# EAGLE board touch_pot_panel_v13 (EAGLE 7.3.0), part 1 of 4
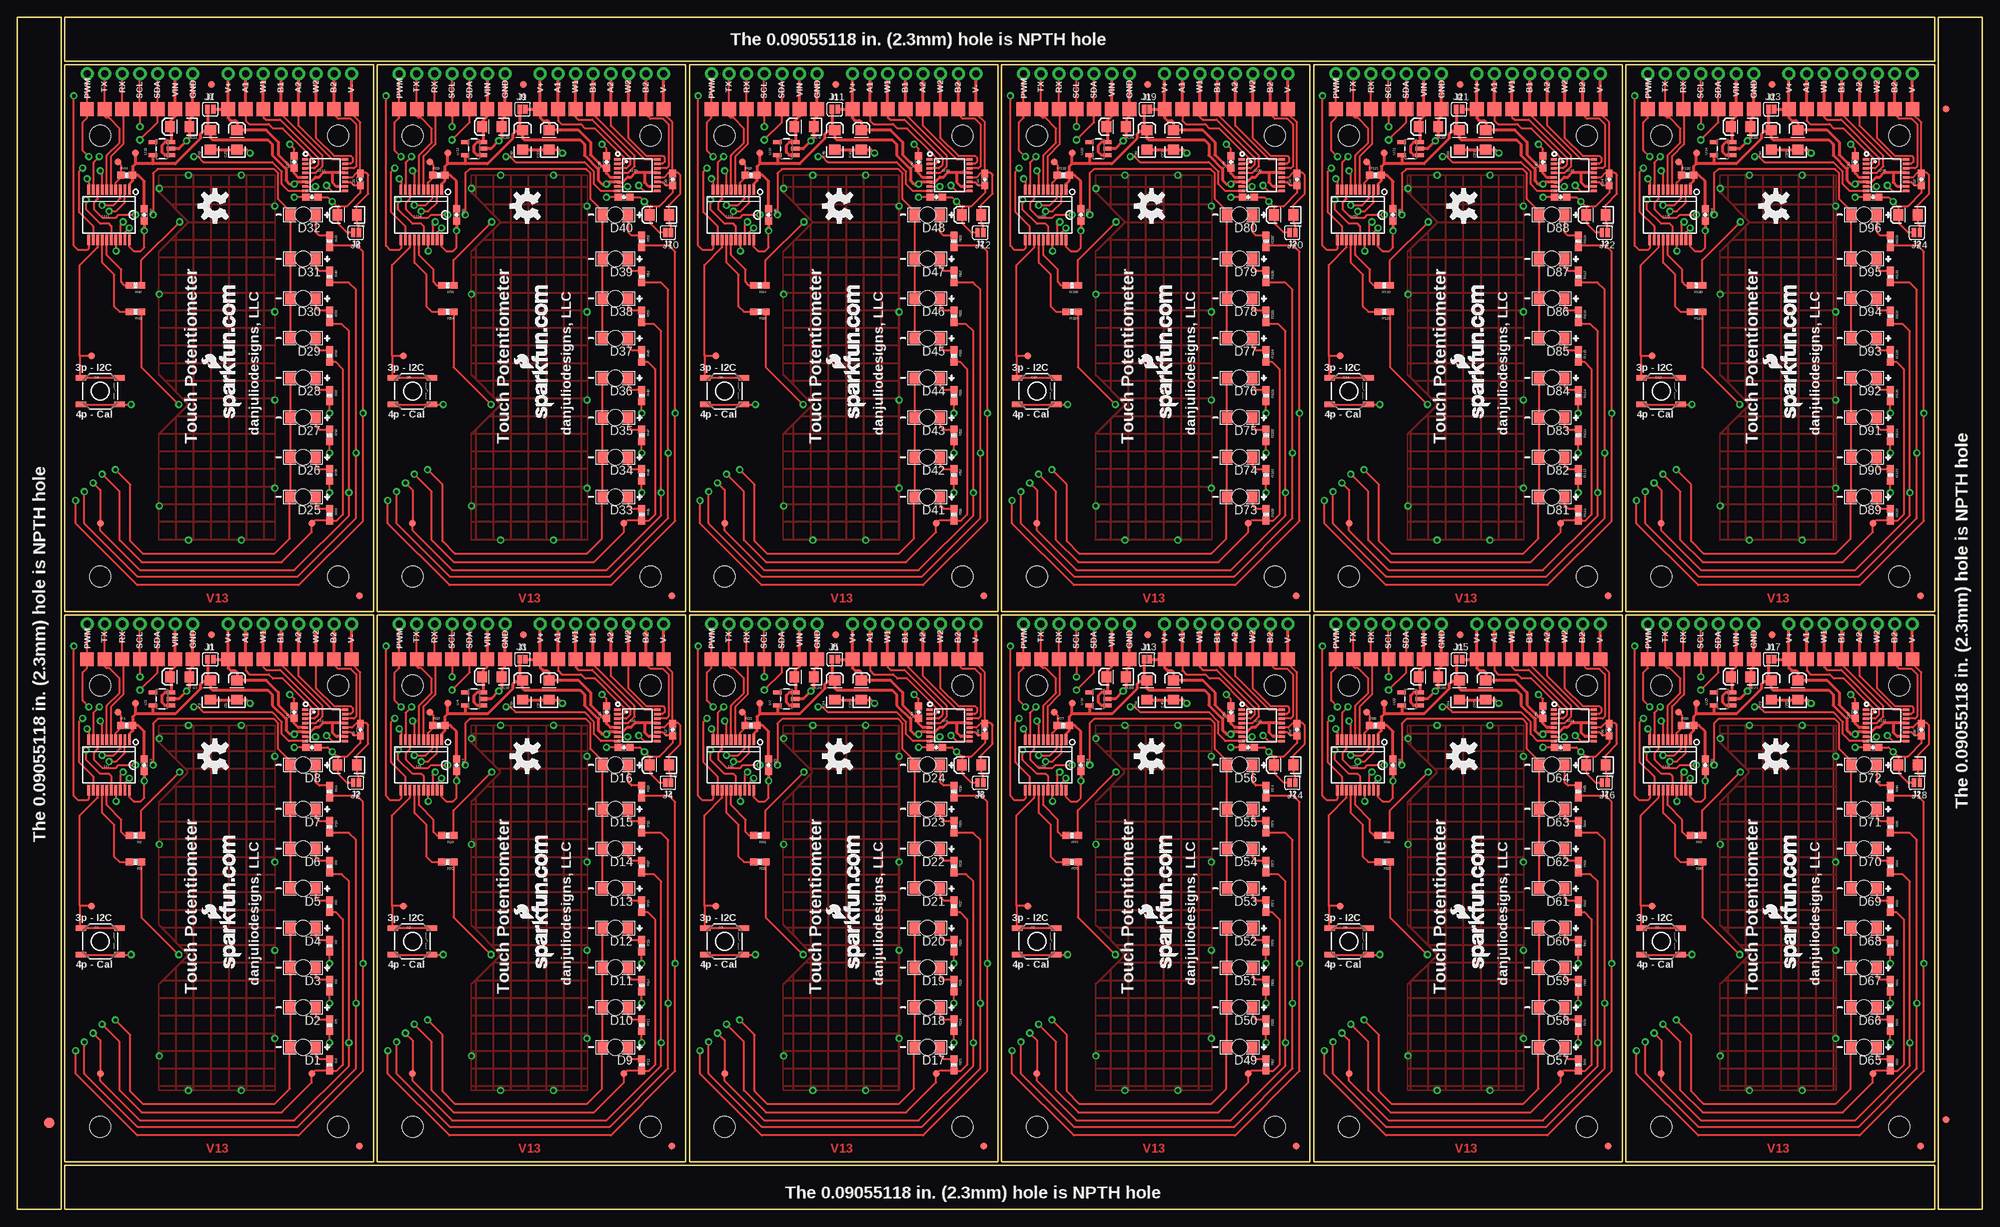
[diagram p0: board, top side]
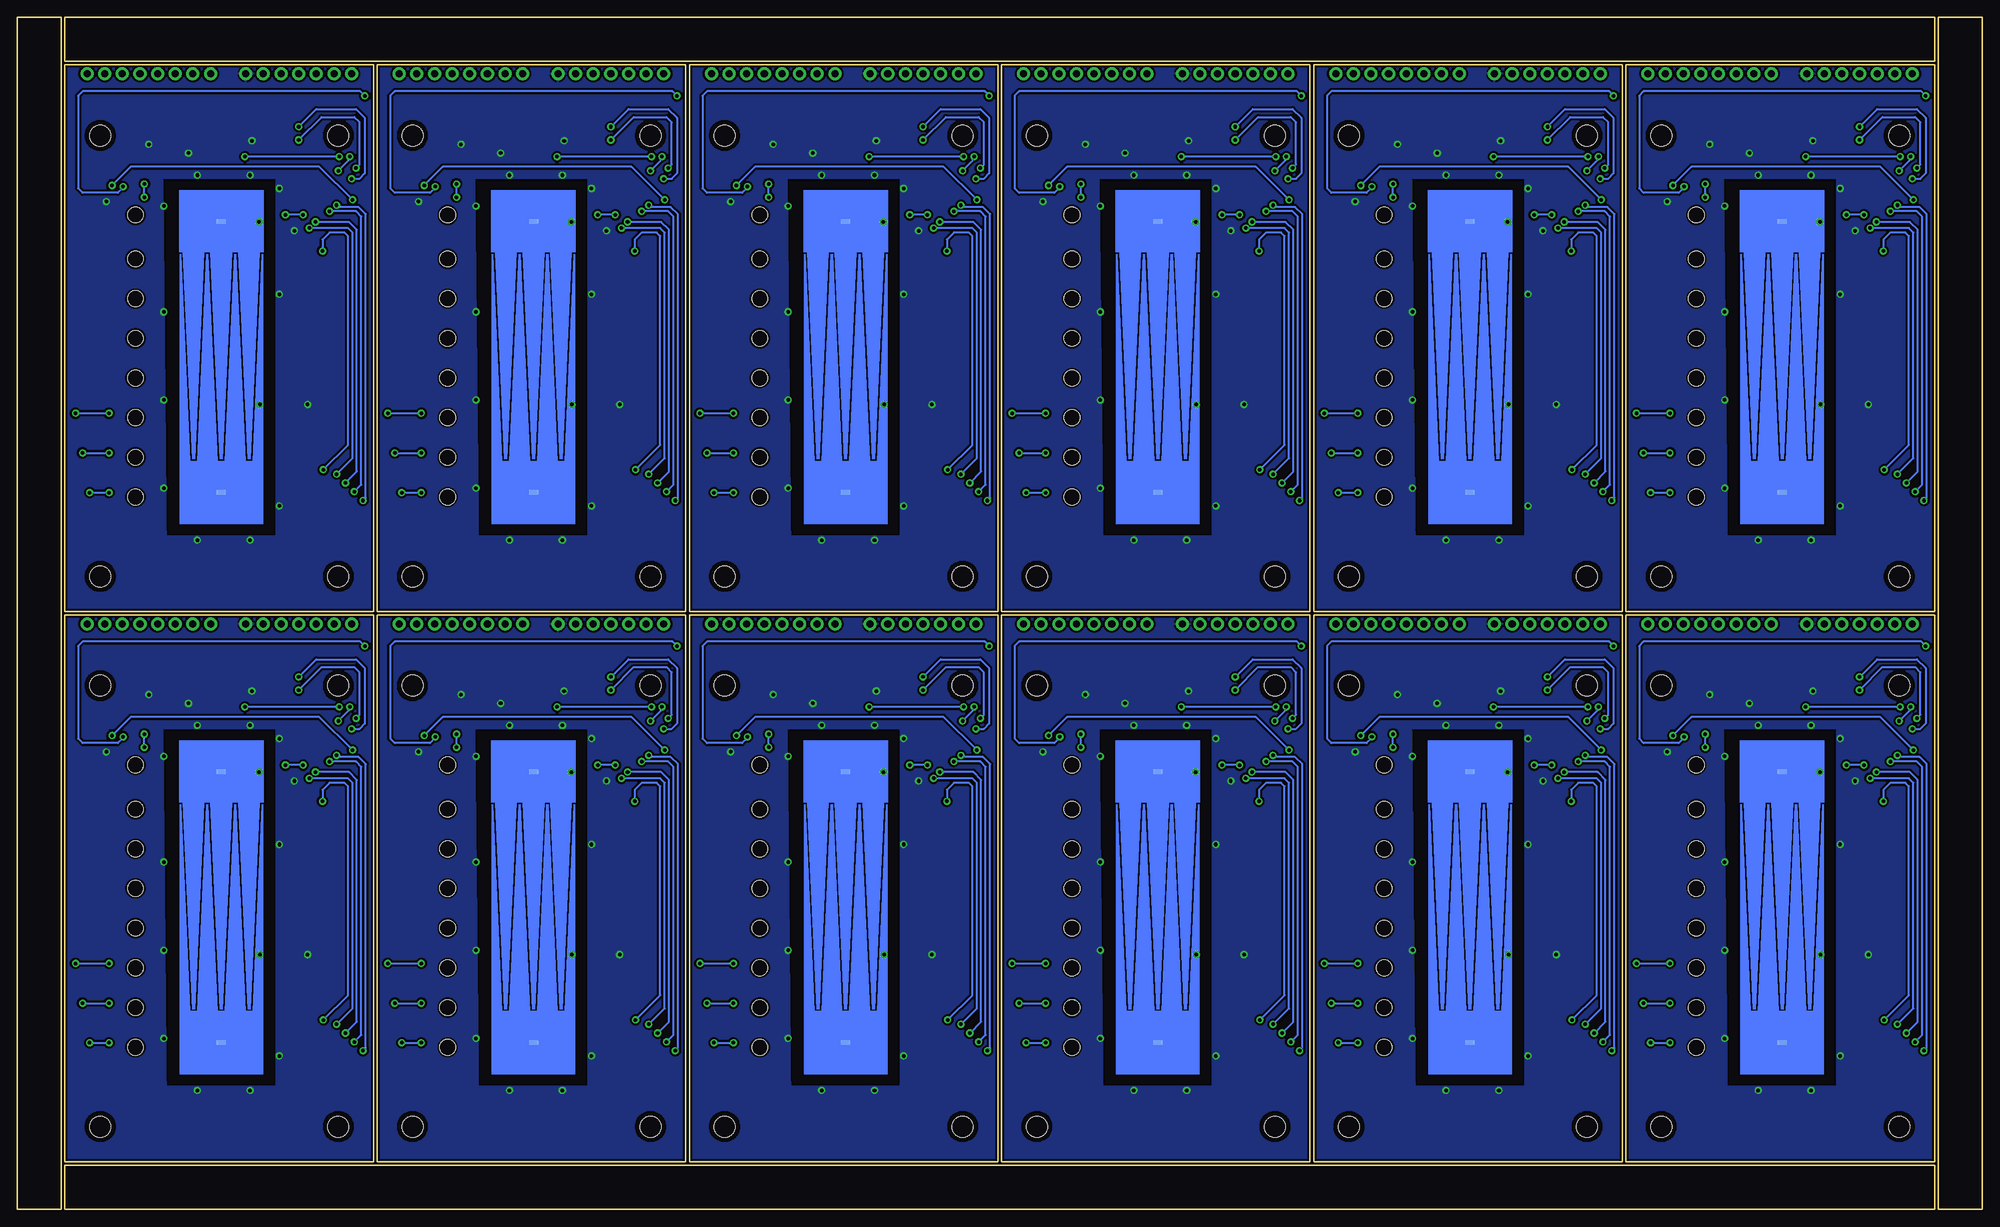
[diagram p1: board, bottom side, seen from below]

Size 282.96 x 171.7 mm. Coordinates in mm from the lower left corner, seen from the top.
Outline: 6.35,79.25 6.35,0 0,0 0,29.72
Outline: 0,27.18 0,171.7 6.35,171.7 6.35,76.71
Outline: 79.25,0 6.86,0 6.86,6.35 29.72,6.35
Outline: 27.18,6.35 276.1,6.35 276.1,0 76.71,0
Outline: 203.71,171.7 276.1,171.7 276.1,165.35 253.24,165.35
Outline: 255.78,165.35 6.86,165.35 6.86,171.7 206.25,171.7
Outline: 276.61,92.46 276.61,171.7 282.96,171.7 282.96,141.99
Outline: 282.96,144.53 282.96,0 276.61,0 276.61,95
Outline: 6.86,6.86 51.31,6.86 51.31,85.6 6.86,85.6 6.86,6.86
Outline: 51.82,6.86 96.27,6.86 96.27,85.6 51.82,85.6 51.82,6.86
Outline: 96.77,6.86 141.22,6.86 141.22,85.6 96.77,85.6 96.77,6.86
Outline: 6.86,86.11 51.31,86.11 51.31,164.85 6.86,164.85 6.86,86.11
Outline: 51.82,86.11 96.27,86.11 96.27,164.85 51.82,164.85 51.82,86.11
Outline: 96.77,86.11 141.22,86.11 141.22,164.85 96.77,164.85 96.77,86.11
Outline: 141.73,6.86 186.18,6.86 186.18,85.6 141.73,85.6 141.73,6.86
Outline: 186.69,6.86 231.14,6.86 231.14,85.6 186.69,85.6 186.69,6.86
Outline: 231.65,6.86 276.1,6.86 276.1,85.6 231.65,85.6 231.65,6.86
Outline: 141.73,86.11 186.18,86.11 186.18,164.85 141.73,164.85 141.73,86.11
Outline: 186.69,86.11 231.14,86.11 231.14,164.85 186.69,164.85 186.69,86.11
Outline: 231.65,86.11 276.1,86.11 276.1,164.85 231.65,164.85 231.65,86.11
Copper layers (1*16): Top 0.035mm / dielectric 1.5mm / Bottom 0.035mm
Design rules "SparkFun-2-layer": minimum track width 7mil, minimum drill 15mil, track to track 8mil, track to pad 8mil, pad to pad 8mil, via to via 8mil, smd to smd 8mil, copper to edge 8mil, drill to drill 8mil, minimum pad ring 12mil, minimum via ring 10mil, stop-mask expansion 4mil, vias tented up to drill 20mil, thermal gap 10mil

## Footprints (pad centres in the part's own frame; a part is rotated, then mirrored left to right if it is on the bottom)
EIA3216 = smd 1.4 x 1.6: A 1.4,0; C -1.4,0
0603-CAP = smd 1.1 x 1: 1 -0.85,0; 2 0.85,0
LED-1206-BOTTOM = smd 1.5 x 1.6: A -1.8,0; C 1.8,0 | hole 2.3: 0,0
FIDUCIAL-1.5X3 = smd 1.5 x 1.5: 1 0,0
FIDUCIAL-1X2 = smd 1 x 1: 1 0,0
SJ_2S = smd 0.635 x 1.27: 1 -0.412,0; 2 0.412,0
1X01NS = drill 1.016 pad 1.88: 1 0,0
0603-RES = smd 1.1 x 1: 1 -0.85,0; 2 0.85,0
TACTILE-SWITCH-SMD = smd 1.524 x 0.762: 1 -2.794,1.905; 2 2.794,1.905; 3 -2.794,-1.905; 4 2.794,-1.905
STAND-OFF-TIGHT = hole 3.048: 0,0
PAD.03X.04 = smd 1.016 x 1.016: P$1 0,0
2MM_SMD_PAD = smd 2 x 2: P$1 0,0
2CH_48MM_LINEAR_TOUCH = smd 1.27 x 0.635: P$1 6,4.5; P$2 6,43.5
SSOP20 = smd 0.4 x 1.5: 1 -2.925,-3.625; 2 -2.275,-3.625; 3 -1.625,-3.625; 4 -0.975,-3.625; 5 -0.325,-3.625; 6 0.325,-3.625; 7 0.975,-3.625; 8 1.625,-3.625; 9 2.275,-3.625; 10 2.925,-3.625; 11 2.925,3.625; 12 2.275,3.625; 13 1.625,3.625; 14 0.975,3.625; 15 0.325,3.625; 16 -0.325,3.625; 17 -0.975,3.625; 18 -1.625,3.625; 19 -2.275,3.625; 20 -2.925,3.625
SSOP16 = smd 0.9 x 0.35: 1 -2.875,2.275; 2 -2.875,1.625; 3 -2.875,0.975; 4 -2.875,0.325; 5 -2.875,-0.325; 6 -2.875,-0.975; 7 -2.875,-1.625; 8 -2.875,-2.275; 9 2.875,-2.275; 10 2.875,-1.625; 11 2.875,-0.975; 12 2.875,-0.325; 13 2.875,0.325; 14 2.875,0.975; 15 2.875,1.625; 16 2.875,2.275
SOT23-5 = smd 0.55 x 1.2: 1 -0.95,-1.3; 2 0,-1.3; 3 0.95,-1.3; 4 0.95,1.3; 5 -0.95,1.3

## Placement (x,y rotation side)
C1  10uF  [EIA3216]  23.37,76.71 180 top
C2  10uF  [EIA3216]  27.81,74.8 90 top
C3  0.1uF  [0603-CAP]  18.29,64.01 270 top
C4  0.1uF  [0603-CAP]  42.42,66.55 0 top
C5  10uF  [EIA3216]  31.62,74.8 90 top
C6  0.1uF  [0603-CAP]  39.88,71.63 90 top
C7  10uF  [EIA3216]  47.5,64.01 180 top
C8  0.1uF  [0603-CAP]  49.4,69.09 90 top
C9  10uF  [EIA3216]  76.58,74.8 90 top
C10  10uF  [EIA3216]  92.46,64.01 180 top
C11  0.1uF  [0603-CAP]  84.84,71.63 90 top
C12  0.1uF  [0603-CAP]  94.36,69.09 90 top
C13  0.1uF  [0603-CAP]  87.38,66.55 0 top
C14  0.1uF  [0603-CAP]  63.25,64.01 270 top
C15  10uF  [EIA3216]  68.33,76.71 180 top
C16  10uF  [EIA3216]  72.77,74.8 90 top
C17  10uF  [EIA3216]  121.54,74.8 90 top
C18  10uF  [EIA3216]  137.41,64.01 180 top
C19  0.1uF  [0603-CAP]  129.79,71.63 90 top
C20  0.1uF  [0603-CAP]  139.32,69.09 90 top
C21  0.1uF  [0603-CAP]  132.33,66.55 0 top
C22  0.1uF  [0603-CAP]  108.2,64.01 270 top
C23  10uF  [EIA3216]  113.28,76.71 180 top
C24  10uF  [EIA3216]  117.73,74.8 90 top
C25  10uF  [EIA3216]  31.62,154.05 90 top
C26  10uF  [EIA3216]  47.5,143.26 180 top
C27  0.1uF  [0603-CAP]  39.88,150.88 90 top
C28  0.1uF  [0603-CAP]  49.4,148.34 90 top
C29  0.1uF  [0603-CAP]  42.42,145.8 0 top
C30  0.1uF  [0603-CAP]  18.29,143.26 270 top
C31  10uF  [EIA3216]  23.37,155.96 180 top
C32  10uF  [EIA3216]  27.81,154.05 90 top
C33  10uF  [EIA3216]  76.58,154.05 90 top
C34  10uF  [EIA3216]  92.46,143.26 180 top
C35  0.1uF  [0603-CAP]  84.84,150.88 90 top
C36  0.1uF  [0603-CAP]  94.36,148.34 90 top
C37  0.1uF  [0603-CAP]  87.38,145.8 0 top
C38  0.1uF  [0603-CAP]  63.25,143.26 270 top
C39  10uF  [EIA3216]  68.33,155.96 180 top
C40  10uF  [EIA3216]  72.77,154.05 90 top
C41  10uF  [EIA3216]  121.54,154.05 90 top
C42  10uF  [EIA3216]  137.41,143.26 180 top
C43  0.1uF  [0603-CAP]  129.79,150.88 90 top
C44  0.1uF  [0603-CAP]  139.32,148.34 90 top
C45  0.1uF  [0603-CAP]  132.33,145.8 0 top
C46  0.1uF  [0603-CAP]  108.2,143.26 270 top
C47  10uF  [EIA3216]  113.28,155.96 180 top
C48  10uF  [EIA3216]  117.73,154.05 90 top
C49  10uF  [EIA3216]  166.5,74.8 90 top
C50  10uF  [EIA3216]  182.37,64.01 180 top
C51  0.1uF  [0603-CAP]  174.75,71.63 90 top
C52  0.1uF  [0603-CAP]  184.28,69.09 90 top
C53  0.1uF  [0603-CAP]  177.29,66.55 0 top
C54  0.1uF  [0603-CAP]  153.16,64.01 270 top
C55  10uF  [EIA3216]  158.24,76.71 180 top
C56  10uF  [EIA3216]  162.69,74.8 90 top
C57  10uF  [EIA3216]  211.46,74.8 90 top
C58  10uF  [EIA3216]  227.33,64.01 180 top
C59  0.1uF  [0603-CAP]  219.71,71.63 90 top
C60  0.1uF  [0603-CAP]  229.24,69.09 90 top
C61  0.1uF  [0603-CAP]  222.25,66.55 0 top
C62  0.1uF  [0603-CAP]  198.12,64.01 270 top
C63  10uF  [EIA3216]  203.2,76.71 180 top
C64  10uF  [EIA3216]  207.65,74.8 90 top
C65  10uF  [EIA3216]  256.41,74.8 90 top
C66  10uF  [EIA3216]  272.29,64.01 180 top
C67  0.1uF  [0603-CAP]  264.67,71.63 90 top
C68  0.1uF  [0603-CAP]  274.19,69.09 90 top
C69  0.1uF  [0603-CAP]  267.21,66.55 0 top
C70  0.1uF  [0603-CAP]  243.08,64.01 270 top
C71  10uF  [EIA3216]  248.16,76.71 180 top
C72  10uF  [EIA3216]  252.6,74.8 90 top
C73  10uF  [EIA3216]  166.5,154.05 90 top
C74  10uF  [EIA3216]  182.37,143.26 180 top
C75  0.1uF  [0603-CAP]  174.75,150.88 90 top
C76  0.1uF  [0603-CAP]  184.28,148.34 90 top
C77  0.1uF  [0603-CAP]  177.29,145.8 0 top
C78  0.1uF  [0603-CAP]  153.16,143.26 270 top
C79  10uF  [EIA3216]  158.24,155.96 180 top
C80  10uF  [EIA3216]  162.69,154.05 90 top
C81  10uF  [EIA3216]  211.46,154.05 90 top
C82  10uF  [EIA3216]  227.33,143.26 180 top
C83  0.1uF  [0603-CAP]  219.71,150.88 90 top
C84  0.1uF  [0603-CAP]  229.24,148.34 90 top
C85  0.1uF  [0603-CAP]  222.25,145.8 0 top
C86  0.1uF  [0603-CAP]  198.12,143.26 270 top
C87  10uF  [EIA3216]  203.2,155.96 180 top
C88  10uF  [EIA3216]  207.65,154.05 90 top
C89  10uF  [EIA3216]  256.41,154.05 90 top
C90  10uF  [EIA3216]  272.29,143.26 180 top
C91  0.1uF  [0603-CAP]  264.67,150.88 90 top
C92  0.1uF  [0603-CAP]  274.19,148.34 90 top
C93  0.1uF  [0603-CAP]  267.21,145.8 0 top
C94  0.1uF  [0603-CAP]  243.08,143.26 270 top
C95  10uF  [EIA3216]  248.16,155.96 180 top
C96  10uF  [EIA3216]  252.6,154.05 90 top
D1  Green  [LED-1206-BOTTOM]  41.15,23.37 180 top
D2  Green  [LED-1206-BOTTOM]  41.15,29.08 180 top
D3  Green  [LED-1206-BOTTOM]  41.15,34.8 180 top
D4  Green  [LED-1206-BOTTOM]  41.15,40.51 180 top
D5  Green  [LED-1206-BOTTOM]  41.15,46.23 180 top
D6  Green  [LED-1206-BOTTOM]  41.15,51.94 180 top
D7  Green  [LED-1206-BOTTOM]  41.15,57.66 180 top
D8  Green  [LED-1206-BOTTOM]  41.15,64.01 180 top
D9  Green  [LED-1206-BOTTOM]  86.11,23.37 180 top
D10  Green  [LED-1206-BOTTOM]  86.11,29.08 180 top
D11  Green  [LED-1206-BOTTOM]  86.11,34.8 180 top
D12  Green  [LED-1206-BOTTOM]  86.11,40.51 180 top
D13  Green  [LED-1206-BOTTOM]  86.11,46.23 180 top
D14  Green  [LED-1206-BOTTOM]  86.11,51.94 180 top
D15  Green  [LED-1206-BOTTOM]  86.11,57.66 180 top
D16  Green  [LED-1206-BOTTOM]  86.11,64.01 180 top
D17  Green  [LED-1206-BOTTOM]  131.06,23.37 180 top
D18  Green  [LED-1206-BOTTOM]  131.06,29.08 180 top
D19  Green  [LED-1206-BOTTOM]  131.06,34.8 180 top
D20  Green  [LED-1206-BOTTOM]  131.06,40.51 180 top
D21  Green  [LED-1206-BOTTOM]  131.06,46.23 180 top
D22  Green  [LED-1206-BOTTOM]  131.06,51.94 180 top
D23  Green  [LED-1206-BOTTOM]  131.06,57.66 180 top
D24  Green  [LED-1206-BOTTOM]  131.06,64.01 180 top
D25  Green  [LED-1206-BOTTOM]  41.15,102.62 180 top
D26  Green  [LED-1206-BOTTOM]  41.15,108.33 180 top
D27  Green  [LED-1206-BOTTOM]  41.15,114.05 180 top
D28  Green  [LED-1206-BOTTOM]  41.15,119.76 180 top
D29  Green  [LED-1206-BOTTOM]  41.15,125.48 180 top
D30  Green  [LED-1206-BOTTOM]  41.15,131.19 180 top
D31  Green  [LED-1206-BOTTOM]  41.15,136.91 180 top
D32  Green  [LED-1206-BOTTOM]  41.15,143.26 180 top
D33  Green  [LED-1206-BOTTOM]  86.11,102.62 180 top
D34  Green  [LED-1206-BOTTOM]  86.11,108.33 180 top
D35  Green  [LED-1206-BOTTOM]  86.11,114.05 180 top
D36  Green  [LED-1206-BOTTOM]  86.11,119.76 180 top
D37  Green  [LED-1206-BOTTOM]  86.11,125.48 180 top
D38  Green  [LED-1206-BOTTOM]  86.11,131.19 180 top
D39  Green  [LED-1206-BOTTOM]  86.11,136.91 180 top
D40  Green  [LED-1206-BOTTOM]  86.11,143.26 180 top
D41  Green  [LED-1206-BOTTOM]  131.06,102.62 180 top
D42  Green  [LED-1206-BOTTOM]  131.06,108.33 180 top
D43  Green  [LED-1206-BOTTOM]  131.06,114.05 180 top
D44  Green  [LED-1206-BOTTOM]  131.06,119.76 180 top
D45  Green  [LED-1206-BOTTOM]  131.06,125.48 180 top
D46  Green  [LED-1206-BOTTOM]  131.06,131.19 180 top
D47  Green  [LED-1206-BOTTOM]  131.06,136.91 180 top
D48  Green  [LED-1206-BOTTOM]  131.06,143.26 180 top
D49  Green  [LED-1206-BOTTOM]  176.02,23.37 180 top
D50  Green  [LED-1206-BOTTOM]  176.02,29.08 180 top
D51  Green  [LED-1206-BOTTOM]  176.02,34.8 180 top
D52  Green  [LED-1206-BOTTOM]  176.02,40.51 180 top
D53  Green  [LED-1206-BOTTOM]  176.02,46.23 180 top
D54  Green  [LED-1206-BOTTOM]  176.02,51.94 180 top
D55  Green  [LED-1206-BOTTOM]  176.02,57.66 180 top
D56  Green  [LED-1206-BOTTOM]  176.02,64.01 180 top
D57  Green  [LED-1206-BOTTOM]  220.98,23.37 180 top
D58  Green  [LED-1206-BOTTOM]  220.98,29.08 180 top
D59  Green  [LED-1206-BOTTOM]  220.98,34.8 180 top
D60  Green  [LED-1206-BOTTOM]  220.98,40.51 180 top
D61  Green  [LED-1206-BOTTOM]  220.98,46.23 180 top
D62  Green  [LED-1206-BOTTOM]  220.98,51.94 180 top
D63  Green  [LED-1206-BOTTOM]  220.98,57.66 180 top
D64  Green  [LED-1206-BOTTOM]  220.98,64.01 180 top
D65  Green  [LED-1206-BOTTOM]  265.94,23.37 180 top
D66  Green  [LED-1206-BOTTOM]  265.94,29.08 180 top
D67  Green  [LED-1206-BOTTOM]  265.94,34.8 180 top
D68  Green  [LED-1206-BOTTOM]  265.94,40.51 180 top
D69  Green  [LED-1206-BOTTOM]  265.94,46.23 180 top
D70  Green  [LED-1206-BOTTOM]  265.94,51.94 180 top
D71  Green  [LED-1206-BOTTOM]  265.94,57.66 180 top
D72  Green  [LED-1206-BOTTOM]  265.94,64.01 180 top
D73  Green  [LED-1206-BOTTOM]  176.02,102.62 180 top
D74  Green  [LED-1206-BOTTOM]  176.02,108.33 180 top
D75  Green  [LED-1206-BOTTOM]  176.02,114.05 180 top
D76  Green  [LED-1206-BOTTOM]  176.02,119.76 180 top
D77  Green  [LED-1206-BOTTOM]  176.02,125.48 180 top
D78  Green  [LED-1206-BOTTOM]  176.02,131.19 180 top
D79  Green  [LED-1206-BOTTOM]  176.02,136.91 180 top
D80  Green  [LED-1206-BOTTOM]  176.02,143.26 180 top
D81  Green  [LED-1206-BOTTOM]  220.98,102.62 180 top
D82  Green  [LED-1206-BOTTOM]  220.98,108.33 180 top
D83  Green  [LED-1206-BOTTOM]  220.98,114.05 180 top
D84  Green  [LED-1206-BOTTOM]  220.98,119.76 180 top
D85  Green  [LED-1206-BOTTOM]  220.98,125.48 180 top
D86  Green  [LED-1206-BOTTOM]  220.98,131.19 180 top
D87  Green  [LED-1206-BOTTOM]  220.98,136.91 180 top
D88  Green  [LED-1206-BOTTOM]  220.98,143.26 180 top
D89  Green  [LED-1206-BOTTOM]  265.94,102.62 180 top
D90  Green  [LED-1206-BOTTOM]  265.94,108.33 180 top
D91  Green  [LED-1206-BOTTOM]  265.94,114.05 180 top
D92  Green  [LED-1206-BOTTOM]  265.94,119.76 180 top
D93  Green  [LED-1206-BOTTOM]  265.94,125.48 180 top
D94  Green  [LED-1206-BOTTOM]  265.94,131.19 180 top
D95  Green  [LED-1206-BOTTOM]  265.94,136.91 180 top
D96  Green  [LED-1206-BOTTOM]  265.94,143.26 180 top
E$1  [FIDUCIAL-1.5X3]  4.57,12.45 0 top
E$7  [FIDUCIAL-1X2]  277.75,158.5 180 top
E$8  [FIDUCIAL-1X2]  277.75,12.95 0 top
FID1  FIDUCIAL1X2  [FIDUCIAL-1X2]  27.94,82.8 0 top
FID2  FIDUCIAL1X2  [FIDUCIAL-1X2]  49.28,9.14 0 top
FID3  FIDUCIAL1X2  [FIDUCIAL-1X2]  72.9,82.8 0 top
FID4  FIDUCIAL1X2  [FIDUCIAL-1X2]  94.23,9.14 0 top
FID5  FIDUCIAL1X2  [FIDUCIAL-1X2]  117.86,82.8 0 top
FID6  FIDUCIAL1X2  [FIDUCIAL-1X2]  139.19,9.14 0 top
FID7  FIDUCIAL1X2  [FIDUCIAL-1X2]  27.94,162.05 0 top
FID8  FIDUCIAL1X2  [FIDUCIAL-1X2]  49.28,88.39 0 top
FID9  FIDUCIAL1X2  [FIDUCIAL-1X2]  72.9,162.05 0 top
FID10  FIDUCIAL1X2  [FIDUCIAL-1X2]  94.23,88.39 0 top
FID11  FIDUCIAL1X2  [FIDUCIAL-1X2]  117.86,162.05 0 top
FID12  FIDUCIAL1X2  [FIDUCIAL-1X2]  139.19,88.39 0 top
FID13  FIDUCIAL1X2  [FIDUCIAL-1X2]  162.81,82.8 0 top
FID14  FIDUCIAL1X2  [FIDUCIAL-1X2]  184.15,9.14 0 top
FID15  FIDUCIAL1X2  [FIDUCIAL-1X2]  207.77,82.8 0 top
FID16  FIDUCIAL1X2  [FIDUCIAL-1X2]  229.11,9.14 0 top
FID17  FIDUCIAL1X2  [FIDUCIAL-1X2]  252.73,82.8 0 top
FID18  FIDUCIAL1X2  [FIDUCIAL-1X2]  274.07,9.14 0 top
FID19  FIDUCIAL1X2  [FIDUCIAL-1X2]  162.81,162.05 0 top
FID20  FIDUCIAL1X2  [FIDUCIAL-1X2]  184.15,88.39 0 top
FID21  FIDUCIAL1X2  [FIDUCIAL-1X2]  207.77,162.05 0 top
FID22  FIDUCIAL1X2  [FIDUCIAL-1X2]  229.11,88.39 0 top
FID23  FIDUCIAL1X2  [FIDUCIAL-1X2]  252.73,162.05 0 top
FID24  FIDUCIAL1X2  [FIDUCIAL-1X2]  274.07,88.39 0 top
J1  [SJ_2S]  27.81,79.25 0 top
J2  [SJ_2S]  48.77,61.47 0 top
J3  [SJ_2S]  72.77,79.25 0 top
J4  [SJ_2S]  93.73,61.47 0 top
J5  [SJ_2S]  117.73,79.25 0 top
J6  [SJ_2S]  138.68,61.47 0 top
J7  [SJ_2S]  27.81,158.5 0 top
J8  [SJ_2S]  48.77,140.72 0 top
J9  [SJ_2S]  72.77,158.5 0 top
J10  [SJ_2S]  93.73,140.72 0 top
J11  [SJ_2S]  117.73,158.5 0 top
J12  [SJ_2S]  138.68,140.72 0 top
J13  [SJ_2S]  162.69,79.25 0 top
J14  [SJ_2S]  183.64,61.47 0 top
J15  [SJ_2S]  207.65,79.25 0 top
J16  [SJ_2S]  228.6,61.47 0 top
J17  [SJ_2S]  252.6,79.25 0 top
J18  [SJ_2S]  273.56,61.47 0 top
J19  [SJ_2S]  162.69,158.5 0 top
J20  [SJ_2S]  183.64,140.72 0 top
J21  [SJ_2S]  207.65,158.5 0 top
J22  [SJ_2S]  228.6,140.72 0 top
J23  [SJ_2S]  252.6,158.5 0 top
J24  [SJ_2S]  273.56,140.72 0 top
JP1  [1X01NS]  20.19,84.33 0 top
JP2  [1X01NS]  17.65,84.33 0 top
JP3  [1X01NS]  10.03,84.33 0 top
JP4  [1X01NS]  15.11,84.33 0 top
JP5  [1X01NS]  12.57,84.33 0 top
JP6  [1X01NS]  22.73,84.33 0 top
JP7  [1X01NS]  25.27,84.33 0 top
JP8  [1X01NS]  48.13,84.33 0 top
JP9  [1X01NS]  45.59,84.33 0 top
JP10  [1X01NS]  43.05,84.33 0 top
JP11  [1X01NS]  40.51,84.33 0 top
JP12  [1X01NS]  37.97,84.33 0 top
JP13  [1X01NS]  35.43,84.33 0 top
JP14  [1X01NS]  32.89,84.33 0 top
JP15  [1X01NS]  30.35,84.33 0 top
JP16  [1X01NS]  65.15,84.33 0 top
JP17  [1X01NS]  62.61,84.33 0 top
JP18  [1X01NS]  54.99,84.33 0 top
JP19  [1X01NS]  60.07,84.33 0 top
JP20  [1X01NS]  57.53,84.33 0 top
JP21  [1X01NS]  67.69,84.33 0 top
JP22  [1X01NS]  70.23,84.33 0 top
JP23  [1X01NS]  93.09,84.33 0 top
JP24  [1X01NS]  90.55,84.33 0 top
JP25  [1X01NS]  88.01,84.33 0 top
JP26  [1X01NS]  85.47,84.33 0 top
JP27  [1X01NS]  82.93,84.33 0 top
JP28  [1X01NS]  80.39,84.33 0 top
JP29  [1X01NS]  77.85,84.33 0 top
JP30  [1X01NS]  75.31,84.33 0 top
JP31  [1X01NS]  110.11,84.33 0 top
JP32  [1X01NS]  107.57,84.33 0 top
JP33  [1X01NS]  99.95,84.33 0 top
JP34  [1X01NS]  105.03,84.33 0 top
JP35  [1X01NS]  102.49,84.33 0 top
JP36  [1X01NS]  112.65,84.33 0 top
JP37  [1X01NS]  115.19,84.33 0 top
JP38  [1X01NS]  138.05,84.33 0 top
JP39  [1X01NS]  135.51,84.33 0 top
JP40  [1X01NS]  132.97,84.33 0 top
JP41  [1X01NS]  130.43,84.33 0 top
JP42  [1X01NS]  127.89,84.33 0 top
JP43  [1X01NS]  125.35,84.33 0 top
JP44  [1X01NS]  122.81,84.33 0 top
JP45  [1X01NS]  120.27,84.33 0 top
JP46  [1X01NS]  20.19,163.58 0 top
JP47  [1X01NS]  17.65,163.58 0 top
JP48  [1X01NS]  10.03,163.58 0 top
JP49  [1X01NS]  15.11,163.58 0 top
JP50  [1X01NS]  12.57,163.58 0 top
JP51  [1X01NS]  22.73,163.58 0 top
JP52  [1X01NS]  25.27,163.58 0 top
JP53  [1X01NS]  48.13,163.58 0 top
JP54  [1X01NS]  45.59,163.58 0 top
JP55  [1X01NS]  43.05,163.58 0 top
JP56  [1X01NS]  40.51,163.58 0 top
JP57  [1X01NS]  37.97,163.58 0 top
JP58  [1X01NS]  35.43,163.58 0 top
JP59  [1X01NS]  32.89,163.58 0 top
JP60  [1X01NS]  30.35,163.58 0 top
JP61  [1X01NS]  65.15,163.58 0 top
JP62  [1X01NS]  62.61,163.58 0 top
JP63  [1X01NS]  54.99,163.58 0 top
JP64  [1X01NS]  60.07,163.58 0 top
JP65  [1X01NS]  57.53,163.58 0 top
JP66  [1X01NS]  67.69,163.58 0 top
JP67  [1X01NS]  70.23,163.58 0 top
JP68  [1X01NS]  93.09,163.58 0 top
JP69  [1X01NS]  90.55,163.58 0 top
JP70  [1X01NS]  88.01,163.58 0 top
JP71  [1X01NS]  85.47,163.58 0 top
JP72  [1X01NS]  82.93,163.58 0 top
JP73  [1X01NS]  80.39,163.58 0 top
JP74  [1X01NS]  77.85,163.58 0 top
JP75  [1X01NS]  75.31,163.58 0 top
JP76  [1X01NS]  110.11,163.58 0 top
JP77  [1X01NS]  107.57,163.58 0 top
JP78  [1X01NS]  99.95,163.58 0 top
JP79  [1X01NS]  105.03,163.58 0 top
JP80  [1X01NS]  102.49,163.58 0 top
JP81  [1X01NS]  112.65,163.58 0 top
JP82  [1X01NS]  115.19,163.58 0 top
JP83  [1X01NS]  138.05,163.58 0 top
JP84  [1X01NS]  135.51,163.58 0 top
JP85  [1X01NS]  132.97,163.58 0 top
JP86  [1X01NS]  130.43,163.58 0 top
JP87  [1X01NS]  127.89,163.58 0 top
JP88  [1X01NS]  125.35,163.58 0 top
JP89  [1X01NS]  122.81,163.58 0 top
JP90  [1X01NS]  120.27,163.58 0 top
JP91  [1X01NS]  155.07,84.33 0 top
JP92  [1X01NS]  152.53,84.33 0 top
JP93  [1X01NS]  144.91,84.33 0 top
JP94  [1X01NS]  149.99,84.33 0 top
JP95  [1X01NS]  147.45,84.33 0 top
JP96  [1X01NS]  157.61,84.33 0 top
JP97  [1X01NS]  160.15,84.33 0 top
JP98  [1X01NS]  183.01,84.33 0 top
JP99  [1X01NS]  180.47,84.33 0 top
JP100  [1X01NS]  177.93,84.33 0 top
JP101  [1X01NS]  175.39,84.33 0 top
JP102  [1X01NS]  172.85,84.33 0 top
JP103  [1X01NS]  170.31,84.33 0 top
JP104  [1X01NS]  167.77,84.33 0 top
JP105  [1X01NS]  165.23,84.33 0 top
JP106  [1X01NS]  200.03,84.33 0 top
JP107  [1X01NS]  197.49,84.33 0 top
JP108  [1X01NS]  189.87,84.33 0 top
JP109  [1X01NS]  194.94,84.33 0 top
JP110  [1X01NS]  192.41,84.33 0 top
JP111  [1X01NS]  202.56,84.33 0 top
JP112  [1X01NS]  205.1,84.33 0 top
JP113  [1X01NS]  227.97,84.33 0 top
JP114  [1X01NS]  225.43,84.33 0 top
JP115  [1X01NS]  222.88,84.33 0 top
JP116  [1X01NS]  220.34,84.33 0 top
JP117  [1X01NS]  217.81,84.33 0 top
JP118  [1X01NS]  215.26,84.33 0 top
JP119  [1X01NS]  212.72,84.33 0 top
JP120  [1X01NS]  210.19,84.33 0 top
JP121  [1X01NS]  244.98,84.33 0 top
JP122  [1X01NS]  242.44,84.33 0 top
JP123  [1X01NS]  234.82,84.33 0 top
JP124  [1X01NS]  239.9,84.33 0 top
JP125  [1X01NS]  237.36,84.33 0 top
JP126  [1X01NS]  247.52,84.33 0 top
JP127  [1X01NS]  250.06,84.33 0 top
JP128  [1X01NS]  272.92,84.33 0 top
JP129  [1X01NS]  270.38,84.33 0 top
JP130  [1X01NS]  267.84,84.33 0 top
JP131  [1X01NS]  265.3,84.33 0 top
JP132  [1X01NS]  262.76,84.33 0 top
JP133  [1X01NS]  260.22,84.33 0 top
JP134  [1X01NS]  257.68,84.33 0 top
JP135  [1X01NS]  255.14,84.33 0 top
JP136  [1X01NS]  155.07,163.58 0 top
JP137  [1X01NS]  152.53,163.58 0 top
JP138  [1X01NS]  144.91,163.58 0 top
JP139  [1X01NS]  149.99,163.58 0 top
JP140  [1X01NS]  147.45,163.58 0 top
JP141  [1X01NS]  157.61,163.58 0 top
JP142  [1X01NS]  160.15,163.58 0 top
JP143  [1X01NS]  183.01,163.58 0 top
JP144  [1X01NS]  180.47,163.58 0 top
JP145  [1X01NS]  177.93,163.58 0 top
JP146  [1X01NS]  175.39,163.58 0 top
JP147  [1X01NS]  172.85,163.58 0 top
JP148  [1X01NS]  170.31,163.58 0 top
JP149  [1X01NS]  167.77,163.58 0 top
JP150  [1X01NS]  165.23,163.58 0 top
JP151  [1X01NS]  200.03,163.58 0 top
JP152  [1X01NS]  197.49,163.58 0 top
JP153  [1X01NS]  189.87,163.58 0 top
JP154  [1X01NS]  194.94,163.58 0 top
JP155  [1X01NS]  192.41,163.58 0 top
JP156  [1X01NS]  202.56,163.58 0 top
JP157  [1X01NS]  205.1,163.58 0 top
JP158  [1X01NS]  227.97,163.58 0 top
JP159  [1X01NS]  225.43,163.58 0 top
JP160  [1X01NS]  222.88,163.58 0 top
JP161  [1X01NS]  220.34,163.58 0 top
JP162  [1X01NS]  217.81,163.58 0 top
JP163  [1X01NS]  215.26,163.58 0 top
JP164  [1X01NS]  212.72,163.58 0 top
JP165  [1X01NS]  210.19,163.58 0 top
JP166  [1X01NS]  244.98,163.58 0 top
JP167  [1X01NS]  242.44,163.58 0 top
JP168  [1X01NS]  234.82,163.58 0 top
JP169  [1X01NS]  239.9,163.58 0 top
JP170  [1X01NS]  237.36,163.58 0 top
JP171  [1X01NS]  247.52,163.58 0 top
JP172  [1X01NS]  250.06,163.58 0 top
JP173  [1X01NS]  272.92,163.58 0 top
JP174  [1X01NS]  270.38,163.58 0 top
JP175  [1X01NS]  267.84,163.58 0 top
JP176  [1X01NS]  265.3,163.58 0 top
JP177  [1X01NS]  262.76,163.58 0 top
JP178  [1X01NS]  260.22,163.58 0 top
JP179  [1X01NS]  257.68,163.58 0 top
JP180  [1X01NS]  255.14,163.58 0 top
R1  10K  [0603-RES]  15.75,69.72 0 top
R2  100  [0603-RES]  17.02,53.85 180 top
R3  100  [0603-RES]  17.02,50.04 180 top
R4  100  [0603-RES]  44.96,20.83 270 top
R5  100  [0603-RES]  44.96,26.54 270 top
R6  100  [0603-RES]  44.96,32.26 270 top
R7  100  [0603-RES]  44.96,37.97 270 top
R8  100  [0603-RES]  44.96,43.69 270 top
R9  100  [0603-RES]  44.96,49.4 270 top
R10  100  [0603-RES]  44.96,55.12 270 top
R11  100  [0603-RES]  44.96,60.2 270 top
R12  100  [0603-RES]  89.92,20.83 270 top
R13  100  [0603-RES]  89.92,26.54 270 top
R14  100  [0603-RES]  89.92,32.26 270 top
R15  100  [0603-RES]  89.92,37.97 270 top
R16  100  [0603-RES]  89.92,43.69 270 top
R17  100  [0603-RES]  89.92,49.4 270 top
R18  100  [0603-RES]  89.92,55.12 270 top
R19  100  [0603-RES]  89.92,60.2 270 top
R20  100  [0603-RES]  61.98,53.85 180 top
R21  100  [0603-RES]  61.98,50.04 180 top
R22  10K  [0603-RES]  60.71,69.72 0 top
R23  100  [0603-RES]  134.87,20.83 270 top
R24  100  [0603-RES]  134.87,26.54 270 top
R25  100  [0603-RES]  134.87,32.26 270 top
R26  100  [0603-RES]  134.87,37.97 270 top
R27  100  [0603-RES]  134.87,43.69 270 top
R28  100  [0603-RES]  134.87,49.4 270 top
R29  100  [0603-RES]  134.87,55.12 270 top
R30  100  [0603-RES]  134.87,60.2 270 top
R31  100  [0603-RES]  106.93,53.85 180 top
R32  100  [0603-RES]  106.93,50.04 180 top
R33  10K  [0603-RES]  105.66,69.72 0 top
R34  100  [0603-RES]  44.96,100.08 270 top
R35  100  [0603-RES]  44.96,105.79 270 top
R36  100  [0603-RES]  44.96,111.51 270 top
R37  100  [0603-RES]  44.96,117.22 270 top
R38  100  [0603-RES]  44.96,122.94 270 top
R39  100  [0603-RES]  44.96,128.65 270 top
R40  100  [0603-RES]  44.96,134.37 270 top
R41  100  [0603-RES]  44.96,139.45 270 top
R42  100  [0603-RES]  17.02,133.1 180 top
R43  100  [0603-RES]  17.02,129.29 180 top
R44  10K  [0603-RES]  15.75,148.97 0 top
R45  100  [0603-RES]  89.92,100.08 270 top
R46  100  [0603-RES]  89.92,105.79 270 top
R47  100  [0603-RES]  89.92,111.51 270 top
R48  100  [0603-RES]  89.92,117.22 270 top
R49  100  [0603-RES]  89.92,122.94 270 top
R50  100  [0603-RES]  89.92,128.65 270 top
R51  100  [0603-RES]  89.92,134.37 270 top
R52  100  [0603-RES]  89.92,139.45 270 top
R53  100  [0603-RES]  61.98,133.1 180 top
R54  100  [0603-RES]  61.98,129.29 180 top
R55  10K  [0603-RES]  60.71,148.97 0 top
R56  100  [0603-RES]  134.87,100.08 270 top
R57  100  [0603-RES]  134.87,105.79 270 top
R58  100  [0603-RES]  134.87,111.51 270 top
R59  100  [0603-RES]  134.87,117.22 270 top
R60  100  [0603-RES]  134.87,122.94 270 top
R61  100  [0603-RES]  134.87,128.65 270 top
R62  100  [0603-RES]  134.87,134.37 270 top
R63  100  [0603-RES]  134.87,139.45 270 top
R64  100  [0603-RES]  106.93,133.1 180 top
R65  100  [0603-RES]  106.93,129.29 180 top
R66  10K  [0603-RES]  105.66,148.97 0 top
R67  100  [0603-RES]  179.83,20.83 270 top
R68  100  [0603-RES]  179.83,26.54 270 top
R69  100  [0603-RES]  179.83,32.26 270 top
R70  100  [0603-RES]  179.83,37.97 270 top
R71  100  [0603-RES]  179.83,43.69 270 top
R72  100  [0603-RES]  179.83,49.4 270 top
R73  100  [0603-RES]  179.83,55.12 270 top
R74  100  [0603-RES]  179.83,60.2 270 top
R75  100  [0603-RES]  151.89,53.85 180 top
R76  100  [0603-RES]  151.89,50.04 180 top
R77  10K  [0603-RES]  150.62,69.72 0 top
R78  100  [0603-RES]  224.79,20.83 270 top
R79  100  [0603-RES]  224.79,26.54 270 top
R80  100  [0603-RES]  224.79,32.26 270 top
R81  100  [0603-RES]  224.79,37.97 270 top
R82  100  [0603-RES]  224.79,43.69 270 top
R83  100  [0603-RES]  224.79,49.4 270 top
R84  100  [0603-RES]  224.79,55.12 270 top
R85  100  [0603-RES]  224.79,60.2 270 top
R86  100  [0603-RES]  196.85,53.85 180 top
R87  100  [0603-RES]  196.85,50.04 180 top
R88  10K  [0603-RES]  195.58,69.72 0 top
R89  100  [0603-RES]  269.75,20.83 270 top
R90  100  [0603-RES]  269.75,26.54 270 top
R91  100  [0603-RES]  269.75,32.26 270 top
R92  100  [0603-RES]  269.75,37.97 270 top
R93  100  [0603-RES]  269.75,43.69 270 top
R94  100  [0603-RES]  269.75,49.4 270 top
R95  100  [0603-RES]  269.75,55.12 270 top
R96  100  [0603-RES]  269.75,60.2 270 top
R97  100  [0603-RES]  241.81,53.85 180 top
R98  100  [0603-RES]  241.81,50.04 180 top
R99  10K  [0603-RES]  240.54,69.72 0 top
R100  100  [0603-RES]  179.83,100.08 270 top
R101  100  [0603-RES]  179.83,105.79 270 top
R102  100  [0603-RES]  179.83,111.51 270 top
R103  100  [0603-RES]  179.83,117.22 270 top
R104  100  [0603-RES]  179.83,122.94 270 top
R105  100  [0603-RES]  179.83,128.65 270 top
R106  100  [0603-RES]  179.83,134.37 270 top
R107  100  [0603-RES]  179.83,139.45 270 top
R108  100  [0603-RES]  151.89,133.1 180 top
R109  100  [0603-RES]  151.89,129.29 180 top
R110  10K  [0603-RES]  150.62,148.97 0 top
R111  100  [0603-RES]  224.79,100.08 270 top
R112  100  [0603-RES]  224.79,105.79 270 top
R113  100  [0603-RES]  224.79,111.51 270 top
R114  100  [0603-RES]  224.79,117.22 270 top
R115  100  [0603-RES]  224.79,122.94 270 top
R116  100  [0603-RES]  224.79,128.65 270 top
R117  100  [0603-RES]  224.79,134.37 270 top
R118  100  [0603-RES]  224.79,139.45 270 top
R119  100  [0603-RES]  196.85,133.1 180 top
R120  100  [0603-RES]  196.85,129.29 180 top
R121  10K  [0603-RES]  195.58,148.97 0 top
R122  100  [0603-RES]  269.75,100.08 270 top
R123  100  [0603-RES]  269.75,105.79 270 top
R124  100  [0603-RES]  269.75,111.51 270 top
R125  100  [0603-RES]  269.75,117.22 270 top
R126  100  [0603-RES]  269.75,122.94 270 top
R127  100  [0603-RES]  269.75,128.65 270 top
R128  100  [0603-RES]  269.75,134.37 270 top
R129  100  [0603-RES]  269.75,139.45 270 top
R130  100  [0603-RES]  241.81,133.1 180 top
R131  100  [0603-RES]  241.81,129.29 180 top
R132  10K  [0603-RES]  240.54,148.97 0 top
S1  [TACTILE-SWITCH-SMD]  11.94,38.61 0 top
S2  [TACTILE-SWITCH-SMD]  56.9,38.61 0 top
S3  [TACTILE-SWITCH-SMD]  101.85,38.61 0 top
S4  [TACTILE-SWITCH-SMD]  11.94,117.86 0 top
S5  [TACTILE-SWITCH-SMD]  56.9,117.86 0 top
S6  [TACTILE-SWITCH-SMD]  101.85,117.86 0 top
S7  [TACTILE-SWITCH-SMD]  146.81,38.61 0 top
S8  [TACTILE-SWITCH-SMD]  191.77,38.61 0 top
S9  [TACTILE-SWITCH-SMD]  236.73,38.61 0 top
S10  [TACTILE-SWITCH-SMD]  146.81,117.86 0 top
S11  [TACTILE-SWITCH-SMD]  191.77,117.86 0 top
S12  [TACTILE-SWITCH-SMD]  236.73,117.86 0 top
STANDOFF1  STAND-OFFTIGHT  [STAND-OFF-TIGHT]  46.23,75.44 0 top
STANDOFF2  STAND-OFFTIGHT  [STAND-OFF-TIGHT]  11.94,75.44 0 top
STANDOFF3  STAND-OFFTIGHT  [STAND-OFF-TIGHT]  11.94,11.94 0 top
STANDOFF4  STAND-OFFTIGHT  [STAND-OFF-TIGHT]  46.23,11.94 0 top
STANDOFF5  STAND-OFFTIGHT  [STAND-OFF-TIGHT]  56.9,75.44 0 top
STANDOFF6  STAND-OFFTIGHT  [STAND-OFF-TIGHT]  56.9,11.94 0 top
STANDOFF7  STAND-OFFTIGHT  [STAND-OFF-TIGHT]  91.19,11.94 0 top
STANDOFF8  STAND-OFFTIGHT  [STAND-OFF-TIGHT]  91.19,75.44 0 top
STANDOFF9  STAND-OFFTIGHT  [STAND-OFF-TIGHT]  101.85,75.44 0 top
STANDOFF10  STAND-OFFTIGHT  [STAND-OFF-TIGHT]  101.85,11.94 0 top
STANDOFF11  STAND-OFFTIGHT  [STAND-OFF-TIGHT]  136.14,11.94 0 top
STANDOFF12  STAND-OFFTIGHT  [STAND-OFF-TIGHT]  136.14,75.44 0 top
STANDOFF13  STAND-OFFTIGHT  [STAND-OFF-TIGHT]  11.94,154.69 0 top
STANDOFF14  STAND-OFFTIGHT  [STAND-OFF-TIGHT]  11.94,91.19 0 top
STANDOFF15  STAND-OFFTIGHT  [STAND-OFF-TIGHT]  46.23,91.19 0 top
STANDOFF16  STAND-OFFTIGHT  [STAND-OFF-TIGHT]  46.23,154.69 0 top
STANDOFF17  STAND-OFFTIGHT  [STAND-OFF-TIGHT]  56.9,154.69 0 top
STANDOFF18  STAND-OFFTIGHT  [STAND-OFF-TIGHT]  56.9,91.19 0 top
STANDOFF19  STAND-OFFTIGHT  [STAND-OFF-TIGHT]  91.19,91.19 0 top
STANDOFF20  STAND-OFFTIGHT  [STAND-OFF-TIGHT]  91.19,154.69 0 top
STANDOFF21  STAND-OFFTIGHT  [STAND-OFF-TIGHT]  101.85,154.69 0 top
STANDOFF22  STAND-OFFTIGHT  [STAND-OFF-TIGHT]  101.85,91.19 0 top
STANDOFF23  STAND-OFFTIGHT  [STAND-OFF-TIGHT]  136.14,91.19 0 top
STANDOFF24  STAND-OFFTIGHT  [STAND-OFF-TIGHT]  136.14,154.69 0 top
STANDOFF25  STAND-OFFTIGHT  [STAND-OFF-TIGHT]  146.81,75.44 0 top
STANDOFF26  STAND-OFFTIGHT  [STAND-OFF-TIGHT]  146.81,11.94 0 top
STANDOFF27  STAND-OFFTIGHT  [STAND-OFF-TIGHT]  181.1,11.94 0 top
STANDOFF28  STAND-OFFTIGHT  [STAND-OFF-TIGHT]  181.1,75.44 0 top
STANDOFF29  STAND-OFFTIGHT  [STAND-OFF-TIGHT]  191.77,75.44 0 top
STANDOFF30  STAND-OFFTIGHT  [STAND-OFF-TIGHT]  191.77,11.94 0 top
STANDOFF31  STAND-OFFTIGHT  [STAND-OFF-TIGHT]  226.06,11.94 0 top
STANDOFF32  STAND-OFFTIGHT  [STAND-OFF-TIGHT]  226.06,75.44 0 top
STANDOFF33  STAND-OFFTIGHT  [STAND-OFF-TIGHT]  236.73,75.44 0 top
STANDOFF34  STAND-OFFTIGHT  [STAND-OFF-TIGHT]  236.73,11.94 0 top
STANDOFF35  STAND-OFFTIGHT  [STAND-OFF-TIGHT]  271.02,11.94 0 top
STANDOFF36  STAND-OFFTIGHT  [STAND-OFF-TIGHT]  271.02,75.44 0 top
STANDOFF37  STAND-OFFTIGHT  [STAND-OFF-TIGHT]  146.81,154.69 0 top
STANDOFF38  STAND-OFFTIGHT  [STAND-OFF-TIGHT]  146.81,91.19 0 top
STANDOFF39  STAND-OFFTIGHT  [STAND-OFF-TIGHT]  181.1,91.19 0 top
STANDOFF40  STAND-OFFTIGHT  [STAND-OFF-TIGHT]  181.1,154.69 0 top
STANDOFF41  STAND-OFFTIGHT  [STAND-OFF-TIGHT]  191.77,154.69 0 top
STANDOFF42  STAND-OFFTIGHT  [STAND-OFF-TIGHT]  191.77,91.19 0 top
STANDOFF43  STAND-OFFTIGHT  [STAND-OFF-TIGHT]  226.06,91.19 0 top
STANDOFF44  STAND-OFFTIGHT  [STAND-OFF-TIGHT]  226.06,154.69 0 top
STANDOFF45  STAND-OFFTIGHT  [STAND-OFF-TIGHT]  236.73,154.69 0 top
STANDOFF46  STAND-OFFTIGHT  [STAND-OFF-TIGHT]  236.73,91.19 0 top
STANDOFF47  STAND-OFFTIGHT  [STAND-OFF-TIGHT]  271.02,91.19 0 top
STANDOFF48  STAND-OFFTIGHT  [STAND-OFF-TIGHT]  271.02,154.69 0 top
TP1  [PAD.03X.04]  14.48,71.63 0 top
TP2  [PAD.03X.04]  17.02,72.9 0 top
TP3  [PAD.03X.04]  10.67,43.69 0 top
TP4  [PAD.03X.04]  42.42,19.56 0 top
TP5  [PAD.03X.04]  11.94,19.56 0 top
TP6  [2MM_SMD_PAD]  20.19,79.25 0 top
TP7  [2MM_SMD_PAD]  17.65,79.25 0 top
TP8  [2MM_SMD_PAD]  10.03,79.25 0 top
TP9  [2MM_SMD_PAD]  15.11,79.25 0 top
TP10  [2MM_SMD_PAD]  12.57,79.25 0 top
TP11  [2MM_SMD_PAD]  22.73,79.25 0 top
TP12  [2MM_SMD_PAD]  25.27,79.25 0 top
TP13  [2MM_SMD_PAD]  48.13,79.25 0 top
TP14  [2MM_SMD_PAD]  45.59,79.25 0 top
TP15  [2MM_SMD_PAD]  43.05,79.25 0 top
TP16  [2MM_SMD_PAD]  40.51,79.25 0 top
TP17  [2MM_SMD_PAD]  37.97,79.25 0 top
TP18  [2MM_SMD_PAD]  35.43,79.25 0 top
TP19  [2MM_SMD_PAD]  32.89,79.25 0 top
TP20  [2MM_SMD_PAD]  30.35,79.25 0 top
TP21  [2MM_SMD_PAD]  65.15,79.25 0 top
TP22  [2MM_SMD_PAD]  62.61,79.25 0 top
TP23  [2MM_SMD_PAD]  54.99,79.25 0 top
TP24  [2MM_SMD_PAD]  60.07,79.25 0 top
TP25  [2MM_SMD_PAD]  57.53,79.25 0 top
TP26  [2MM_SMD_PAD]  67.69,79.25 0 top
TP27  [2MM_SMD_PAD]  70.23,79.25 0 top
TP28  [2MM_SMD_PAD]  93.09,79.25 0 top
TP29  [2MM_SMD_PAD]  90.55,79.25 0 top
TP30  [2MM_SMD_PAD]  88.01,79.25 0 top
TP31  [2MM_SMD_PAD]  85.47,79.25 0 top
TP32  [2MM_SMD_PAD]  82.93,79.25 0 top
TP33  [2MM_SMD_PAD]  80.39,79.25 0 top
TP34  [2MM_SMD_PAD]  77.85,79.25 0 top
TP35  [2MM_SMD_PAD]  75.31,79.25 0 top
TP36  [PAD.03X.04]  61.98,72.9 0 top
TP37  [PAD.03X.04]  55.63,43.69 0 top
TP38  [PAD.03X.04]  59.44,71.63 0 top
TP39  [PAD.03X.04]  87.38,19.56 0 top
TP40  [PAD.03X.04]  56.9,19.56 0 top
TP41  [2MM_SMD_PAD]  110.11,79.25 0 top
TP42  [2MM_SMD_PAD]  107.57,79.25 0 top
TP43  [2MM_SMD_PAD]  99.95,79.25 0 top
TP44  [2MM_SMD_PAD]  105.03,79.25 0 top
TP45  [2MM_SMD_PAD]  102.49,79.25 0 top
TP46  [2MM_SMD_PAD]  112.65,79.25 0 top
TP47  [2MM_SMD_PAD]  115.19,79.25 0 top
TP48  [2MM_SMD_PAD]  138.05,79.25 0 top
TP49  [2MM_SMD_PAD]  135.51,79.25 0 top
TP50  [2MM_SMD_PAD]  132.97,79.25 0 top
TP51  [2MM_SMD_PAD]  130.43,79.25 0 top
TP52  [2MM_SMD_PAD]  127.89,79.25 0 top
TP53  [2MM_SMD_PAD]  125.35,79.25 0 top
TP54  [2MM_SMD_PAD]  122.81,79.25 0 top
TP55  [2MM_SMD_PAD]  120.27,79.25 0 top
TP56  [PAD.03X.04]  106.93,72.9 0 top
TP57  [PAD.03X.04]  100.58,43.69 0 top
TP58  [PAD.03X.04]  104.39,71.63 0 top
TP59  [PAD.03X.04]  132.33,19.56 0 top
TP60  [PAD.03X.04]  101.85,19.56 0 top
TP61  [2MM_SMD_PAD]  20.19,158.5 0 top
TP62  [2MM_SMD_PAD]  17.65,158.5 0 top
TP63  [2MM_SMD_PAD]  10.03,158.5 0 top
TP64  [2MM_SMD_PAD]  15.11,158.5 0 top
TP65  [2MM_SMD_PAD]  12.57,158.5 0 top
TP66  [2MM_SMD_PAD]  22.73,158.5 0 top
TP67  [2MM_SMD_PAD]  25.27,158.5 0 top
TP68  [2MM_SMD_PAD]  48.13,158.5 0 top
TP69  [2MM_SMD_PAD]  45.59,158.5 0 top
TP70  [2MM_SMD_PAD]  43.05,158.5 0 top
TP71  [2MM_SMD_PAD]  40.51,158.5 0 top
TP72  [2MM_SMD_PAD]  37.97,158.5 0 top
TP73  [2MM_SMD_PAD]  35.43,158.5 0 top
TP74  [2MM_SMD_PAD]  32.89,158.5 0 top
TP75  [2MM_SMD_PAD]  30.35,158.5 0 top
TP76  [PAD.03X.04]  17.02,152.15 0 top
TP77  [PAD.03X.04]  10.67,122.94 0 top
TP78  [PAD.03X.04]  14.48,150.88 0 top
TP79  [PAD.03X.04]  42.42,98.81 0 top
TP80  [PAD.03X.04]  11.94,98.81 0 top
TP81  [2MM_SMD_PAD]  65.15,158.5 0 top
TP82  [2MM_SMD_PAD]  62.61,158.5 0 top
TP83  [2MM_SMD_PAD]  54.99,158.5 0 top
TP84  [2MM_SMD_PAD]  60.07,158.5 0 top
TP85  [2MM_SMD_PAD]  57.53,158.5 0 top
TP86  [2MM_SMD_PAD]  67.69,158.5 0 top
TP87  [2MM_SMD_PAD]  70.23,158.5 0 top
TP88  [2MM_SMD_PAD]  93.09,158.5 0 top
TP89  [2MM_SMD_PAD]  90.55,158.5 0 top
TP90  [2MM_SMD_PAD]  88.01,158.5 0 top
TP91  [2MM_SMD_PAD]  85.47,158.5 0 top
TP92  [2MM_SMD_PAD]  82.93,158.5 0 top
TP93  [2MM_SMD_PAD]  80.39,158.5 0 top
TP94  [2MM_SMD_PAD]  77.85,158.5 0 top
TP95  [2MM_SMD_PAD]  75.31,158.5 0 top
TP96  [PAD.03X.04]  61.98,152.15 0 top
TP97  [PAD.03X.04]  55.63,122.94 0 top
TP98  [PAD.03X.04]  59.44,150.88 0 top
TP99  [PAD.03X.04]  87.38,98.81 0 top
TP100  [PAD.03X.04]  56.9,98.81 0 top
TP101  [2MM_SMD_PAD]  110.11,158.5 0 top
TP102  [2MM_SMD_PAD]  107.57,158.5 0 top
TP103  [2MM_SMD_PAD]  99.95,158.5 0 top
TP104  [2MM_SMD_PAD]  105.03,158.5 0 top
TP105  [2MM_SMD_PAD]  102.49,158.5 0 top
TP106  [2MM_SMD_PAD]  112.65,158.5 0 top
TP107  [2MM_SMD_PAD]  115.19,158.5 0 top
TP108  [2MM_SMD_PAD]  138.05,158.5 0 top
TP109  [2MM_SMD_PAD]  135.51,158.5 0 top
TP110  [2MM_SMD_PAD]  132.97,158.5 0 top
TP111  [2MM_SMD_PAD]  130.43,158.5 0 top
TP112  [2MM_SMD_PAD]  127.89,158.5 0 top
TP113  [2MM_SMD_PAD]  125.35,158.5 0 top
TP114  [2MM_SMD_PAD]  122.81,158.5 0 top
TP115  [2MM_SMD_PAD]  120.27,158.5 0 top
TP116  [PAD.03X.04]  106.93,152.15 0 top
TP117  [PAD.03X.04]  100.58,122.94 0 top
TP118  [PAD.03X.04]  104.39,150.88 0 top
TP119  [PAD.03X.04]  132.33,98.81 0 top
TP120  [PAD.03X.04]  101.85,98.81 0 top
TP121  [2MM_SMD_PAD]  155.07,79.25 0 top
TP122  [2MM_SMD_PAD]  152.53,79.25 0 top
TP123  [2MM_SMD_PAD]  144.91,79.25 0 top
TP124  [2MM_SMD_PAD]  149.99,79.25 0 top
TP125  [2MM_SMD_PAD]  147.45,79.25 0 top
TP126  [2MM_SMD_PAD]  157.61,79.25 0 top
TP127  [2MM_SMD_PAD]  160.15,79.25 0 top
TP128  [2MM_SMD_PAD]  183.01,79.25 0 top
TP129  [2MM_SMD_PAD]  180.47,79.25 0 top
TP130  [2MM_SMD_PAD]  177.93,79.25 0 top
TP131  [2MM_SMD_PAD]  175.39,79.25 0 top
TP132  [2MM_SMD_PAD]  172.85,79.25 0 top
TP133  [2MM_SMD_PAD]  170.31,79.25 0 top
TP134  [2MM_SMD_PAD]  167.77,79.25 0 top
TP135  [2MM_SMD_PAD]  165.23,79.25 0 top
TP136  [PAD.03X.04]  151.89,72.9 0 top
TP137  [PAD.03X.04]  145.54,43.69 0 top
TP138  [PAD.03X.04]  149.35,71.63 0 top
TP139  [PAD.03X.04]  177.29,19.56 0 top
TP140  [PAD.03X.04]  146.81,19.56 0 top
TP141  [2MM_SMD_PAD]  200.03,79.25 0 top
TP142  [2MM_SMD_PAD]  197.49,79.25 0 top
TP143  [2MM_SMD_PAD]  189.87,79.25 0 top
TP144  [2MM_SMD_PAD]  194.94,79.25 0 top
TP145  [2MM_SMD_PAD]  192.41,79.25 0 top
TP146  [2MM_SMD_PAD]  202.56,79.25 0 top
TP147  [2MM_SMD_PAD]  205.1,79.25 0 top
TP148  [2MM_SMD_PAD]  227.97,79.25 0 top
TP149  [2MM_SMD_PAD]  225.43,79.25 0 top
TP150  [2MM_SMD_PAD]  222.88,79.25 0 top
TP151  [2MM_SMD_PAD]  220.34,79.25 0 top
TP152  [2MM_SMD_PAD]  217.81,79.25 0 top
TP153  [2MM_SMD_PAD]  215.26,79.25 0 top
TP154  [2MM_SMD_PAD]  212.72,79.25 0 top
TP155  [2MM_SMD_PAD]  210.19,79.25 0 top
TP156  [PAD.03X.04]  196.85,72.9 0 top
TP157  [PAD.03X.04]  190.5,43.69 0 top
TP158  [PAD.03X.04]  194.31,71.63 0 top
TP159  [PAD.03X.04]  222.25,19.56 0 top
TP160  [PAD.03X.04]  191.77,19.56 0 top
TP161  [2MM_SMD_PAD]  244.98,79.25 0 top
TP162  [2MM_SMD_PAD]  242.44,79.25 0 top
TP163  [2MM_SMD_PAD]  234.82,79.25 0 top
TP164  [2MM_SMD_PAD]  239.9,79.25 0 top
TP165  [2MM_SMD_PAD]  237.36,79.25 0 top
TP166  [2MM_SMD_PAD]  247.52,79.25 0 top
TP167  [2MM_SMD_PAD]  250.06,79.25 0 top
TP168  [2MM_SMD_PAD]  272.92,79.25 0 top
TP169  [2MM_SMD_PAD]  270.38,79.25 0 top
TP170  [2MM_SMD_PAD]  267.84,79.25 0 top
TP171  [2MM_SMD_PAD]  265.3,79.25 0 top
TP172  [2MM_SMD_PAD]  262.76,79.25 0 top
TP173  [2MM_SMD_PAD]  260.22,79.25 0 top
TP174  [2MM_SMD_PAD]  257.68,79.25 0 top
TP175  [2MM_SMD_PAD]  255.14,79.25 0 top
TP176  [PAD.03X.04]  241.81,72.9 0 top
TP177  [PAD.03X.04]  235.46,43.69 0 top
TP178  [PAD.03X.04]  239.27,71.63 0 top
TP179  [PAD.03X.04]  267.21,19.56 0 top
TP180  [PAD.03X.04]  236.73,19.56 0 top
TP181  [2MM_SMD_PAD]  155.07,158.5 0 top
TP182  [2MM_SMD_PAD]  152.53,158.5 0 top
TP183  [2MM_SMD_PAD]  144.91,158.5 0 top
TP184  [2MM_SMD_PAD]  149.99,158.5 0 top
TP185  [2MM_SMD_PAD]  147.45,158.5 0 top
TP186  [2MM_SMD_PAD]  157.61,158.5 0 top
TP187  [2MM_SMD_PAD]  160.15,158.5 0 top
TP188  [2MM_SMD_PAD]  183.01,158.5 0 top
TP189  [2MM_SMD_PAD]  180.47,158.5 0 top
TP190  [2MM_SMD_PAD]  177.93,158.5 0 top
TP191  [2MM_SMD_PAD]  175.39,158.5 0 top
TP192  [2MM_SMD_PAD]  172.85,158.5 0 top
TP193  [2MM_SMD_PAD]  170.31,158.5 0 top
TP194  [2MM_SMD_PAD]  167.77,158.5 0 top
TP195  [2MM_SMD_PAD]  165.23,158.5 0 top
TP196  [PAD.03X.04]  151.89,152.15 0 top
TP197  [PAD.03X.04]  145.54,122.94 0 top
TP198  [PAD.03X.04]  149.35,150.88 0 top
TP199  [PAD.03X.04]  177.29,98.81 0 top
TP200  [PAD.03X.04]  146.81,98.81 0 top
TP201  [2MM_SMD_PAD]  200.03,158.5 0 top
TP202  [2MM_SMD_PAD]  197.49,158.5 0 top
TP203  [2MM_SMD_PAD]  189.87,158.5 0 top
TP204  [2MM_SMD_PAD]  194.94,158.5 0 top
TP205  [2MM_SMD_PAD]  192.41,158.5 0 top
TP206  [2MM_SMD_PAD]  202.56,158.5 0 top
TP207  [2MM_SMD_PAD]  205.1,158.5 0 top
TP208  [2MM_SMD_PAD]  227.97,158.5 0 top
TP209  [2MM_SMD_PAD]  225.43,158.5 0 top
TP210  [2MM_SMD_PAD]  222.88,158.5 0 top
TP211  [2MM_SMD_PAD]  220.34,158.5 0 top
TP212  [2MM_SMD_PAD]  217.81,158.5 0 top
TP213  [2MM_SMD_PAD]  215.26,158.5 0 top
TP214  [2MM_SMD_PAD]  212.72,158.5 0 top
TP215  [2MM_SMD_PAD]  210.19,158.5 0 top
TP216  [PAD.03X.04]  196.85,152.15 0 top
TP217  [PAD.03X.04]  190.5,122.94 0 top
TP218  [PAD.03X.04]  194.31,150.88 0 top
TP219  [PAD.03X.04]  222.25,98.81 0 top
TP220  [PAD.03X.04]  191.77,98.81 0 top
TP221  [2MM_SMD_PAD]  244.98,158.5 0 top
TP222  [2MM_SMD_PAD]  242.44,158.5 0 top
TP223  [2MM_SMD_PAD]  234.82,158.5 0 top
TP224  [2MM_SMD_PAD]  239.9,158.5 0 top
TP225  [2MM_SMD_PAD]  237.36,158.5 0 top
TP226  [2MM_SMD_PAD]  247.52,158.5 0 top
TP227  [2MM_SMD_PAD]  250.06,158.5 0 top
TP228  [2MM_SMD_PAD]  272.92,158.5 0 top
TP229  [2MM_SMD_PAD]  270.38,158.5 0 top
TP230  [2MM_SMD_PAD]  267.84,158.5 0 top
TP231  [2MM_SMD_PAD]  265.3,158.5 0 top
TP232  [2MM_SMD_PAD]  262.76,158.5 0 top
TP233  [2MM_SMD_PAD]  260.22,158.5 0 top
TP234  [2MM_SMD_PAD]  257.68,158.5 0 top
TP235  [2MM_SMD_PAD]  255.14,158.5 0 top
TP236  [PAD.03X.04]  241.81,152.15 0 top
TP237  [PAD.03X.04]  235.46,122.94 0 top
TP238  [PAD.03X.04]  239.27,150.88 0 top
TP239  [PAD.03X.04]  267.21,98.81 0 top
TP240  [PAD.03X.04]  236.73,98.81 0 top
TS1  [2CH_48MM_LINEAR_TOUCH]  34.8,19.56 0 bottom
TS2  [2CH_48MM_LINEAR_TOUCH]  79.76,19.56 0 bottom
TS3  [2CH_48MM_LINEAR_TOUCH]  124.71,19.56 0 bottom
TS4  [2CH_48MM_LINEAR_TOUCH]  34.8,98.81 0 bottom
TS5  [2CH_48MM_LINEAR_TOUCH]  79.76,98.81 0 bottom
TS6  [2CH_48MM_LINEAR_TOUCH]  124.71,98.81 0 bottom
TS7  [2CH_48MM_LINEAR_TOUCH]  169.67,19.56 0 bottom
TS8  [2CH_48MM_LINEAR_TOUCH]  214.63,19.56 0 bottom
TS9  [2CH_48MM_LINEAR_TOUCH]  259.59,19.56 0 bottom
TS10  [2CH_48MM_LINEAR_TOUCH]  169.67,98.81 0 bottom
TS11  [2CH_48MM_LINEAR_TOUCH]  214.63,98.81 0 bottom
TS12  [2CH_48MM_LINEAR_TOUCH]  259.59,98.81 0 bottom
U1  PIC16F1829  [SSOP20]  13.21,64.01 180 top
U2  AD5262  [SSOP16]  44.32,69.72 0 top
U3  5V  [SOT23-5]  20.83,73.53 90 top
U4  5V  [SOT23-5]  65.79,73.53 90 top
U5  PIC16F1829  [SSOP20]  58.17,64.01 180 top
U6  AD5262  [SSOP16]  89.28,69.72 0 top
U7  5V  [SOT23-5]  110.74,73.53 90 top
U8  PIC16F1829  [SSOP20]  103.12,64.01 180 top
U9  AD5262  [SSOP16]  134.24,69.72 0 top
U10  5V  [SOT23-5]  20.83,152.78 90 top
U11  PIC16F1829  [SSOP20]  13.21,143.26 180 top
U12  AD5262  [SSOP16]  44.32,148.97 0 top
U13  5V  [SOT23-5]  65.79,152.78 90 top
U14  PIC16F1829  [SSOP20]  58.17,143.26 180 top
U15  AD5262  [SSOP16]  89.28,148.97 0 top
U16  5V  [SOT23-5]  110.74,152.78 90 top
U17  PIC16F1829  [SSOP20]  103.12,143.26 180 top
U18  AD5262  [SSOP16]  134.24,148.97 0 top
U19  5V  [SOT23-5]  155.7,73.53 90 top
U20  PIC16F1829  [SSOP20]  148.08,64.01 180 top
U21  AD5262  [SSOP16]  179.2,69.72 0 top
U22  5V  [SOT23-5]  200.66,73.53 90 top
U23  PIC16F1829  [SSOP20]  193.04,64.01 180 top
U24  AD5262  [SSOP16]  224.16,69.72 0 top
U25  5V  [SOT23-5]  245.62,73.53 90 top
U26  PIC16F1829  [SSOP20]  238,64.01 180 top
U27  AD5262  [SSOP16]  269.11,69.72 0 top
U28  5V  [SOT23-5]  155.7,152.78 90 top
U29  PIC16F1829  [SSOP20]  148.08,143.26 180 top
U30  AD5262  [SSOP16]  179.2,148.97 0 top
U31  5V  [SOT23-5]  200.66,152.78 90 top
U32  PIC16F1829  [SSOP20]  193.04,143.26 180 top
U33  AD5262  [SSOP16]  224.16,148.97 0 top
U34  5V  [SOT23-5]  245.62,152.78 90 top
U35  PIC16F1829  [SSOP20]  238,143.26 180 top
U36  AD5262  [SSOP16]  269.11,148.97 0 top
U$1  OSHW-LOGOM  [OSHW-LOGO-M]  73.41,65.28 90 top
U$2  SFE_LOGO_NAME_WEB  [SFE-NEW-WEBLOGO]  77.22,34.8 90 top
U$3  OSHW-LOGOM  [OSHW-LOGO-M]  118.36,65.28 90 top
U$4  OSHW-LOGOM  [OSHW-LOGO-M]  28.45,65.28 90 top
U$5  SFE_LOGO_NAME_WEB  [SFE-NEW-WEBLOGO]  32.26,34.8 90 top
U$6  SFE_LOGO_NAME_WEB  [SFE-NEW-WEBLOGO]  122.17,34.8 90 top
U$7  OSHW-LOGOM  [OSHW-LOGO-M]  28.45,144.53 90 top
U$8  SFE_LOGO_NAME_WEB  [SFE-NEW-WEBLOGO]  32.26,114.05 90 top
U$9  OSHW-LOGOM  [OSHW-LOGO-M]  73.41,144.53 90 top
U$10  SFE_LOGO_NAME_WEB  [SFE-NEW-WEBLOGO]  77.22,114.05 90 top
U$11  OSHW-LOGOM  [OSHW-LOGO-M]  118.36,144.53 90 top
U$12  SFE_LOGO_NAME_WEB  [SFE-NEW-WEBLOGO]  122.17,114.05 90 top
U$13  OSHW-LOGOM  [OSHW-LOGO-M]  163.32,65.28 90 top
U$14  SFE_LOGO_NAME_WEB  [SFE-NEW-WEBLOGO]  167.13,34.8 90 top
U$15  OSHW-LOGOM  [OSHW-LOGO-M]  208.28,65.28 90 top
U$16  SFE_LOGO_NAME_WEB  [SFE-NEW-WEBLOGO]  212.09,34.8 90 top
U$17  OSHW-LOGOM  [OSHW-LOGO-M]  253.24,65.28 90 top
U$18  SFE_LOGO_NAME_WEB  [SFE-NEW-WEBLOGO]  257.05,34.8 90 top
U$19  OSHW-LOGOM  [OSHW-LOGO-M]  163.32,144.53 90 top
U$20  SFE_LOGO_NAME_WEB  [SFE-NEW-WEBLOGO]  167.13,114.05 90 top
U$21  OSHW-LOGOM  [OSHW-LOGO-M]  208.28,144.53 90 top
U$22  SFE_LOGO_NAME_WEB  [SFE-NEW-WEBLOGO]  212.09,114.05 90 top
U$23  OSHW-LOGOM  [OSHW-LOGO-M]  253.24,144.53 90 top
U$24  SFE_LOGO_NAME_WEB  [SFE-NEW-WEBLOGO]  257.05,114.05 90 top

## Library data of the parts
C1 C2 C5 C7 C9 C10 C15-C18 C23-C26 C31-C34 C39-C42 C47-C50 C55-C58 C63-C66 C71-C74 C79-C82 C87-C90 C95 C96 = SparkFun-Capacitors; PROD_ID: CAP-00811
C3 C4 C6 C8 C11-C14 C19-C22 C27-C30 C35-C38 C43-C46 C51-C54 C59-C62 C67-C70 C75-C78 C83-C86 C91-C94 = SparkFun-Capacitors; PROD_ID: CAP-00810
D1-D96 = SparkFun-LED; PROD_ID: DIO-11076
E$1 = SparkFun-Retired
E$7 E$8 FID1-FID24 U$2 U$5 U$6 U$8 U$10 U$12 U$14 U$16 U$18 U$20 U$22 U$24 = SparkFun-Aesthetics
J1-J24 TP6-TP35 TP41-TP55 TP61-TP75 TP81-TP95 TP101-TP115 TP121-TP135 TP141-TP155 TP161-TP175 TP181-TP195 TP201-TP215 TP221-TP235 TS1-TS12 = djd_eagle_library
JP1-JP180 U$1 U$3 U$4 U$7 U$9 U$11 U$13 U$15 U$17 U$19 U$21 U$23 = SparkFun
R1 R22 R33 R44 R55 R66 R77 R88 R99 R110 R121 R132 = SparkFun-Resistors; PROD_ID: RES-00824
R2-R21 R23-R32 R34-R43 R45-R54 R56-R65 R67-R76 R78-R87 R89-R98 R100-R109 R111-R120 R122-R131 = SparkFun-Resistors; PROD_ID: RES-07863
S1-S12 = SparkFun-Electromechanical; PROD_ID: SWCH-08247
STANDOFF1-STANDOFF48 = SparkFun-Electromechanical
TP1-TP5 TP36-TP40 TP56-TP60 TP76-TP80 TP96-TP100 TP116-TP120 TP136-TP140 TP156-TP160 TP176-TP180 TP196-TP200 TP216-TP220 TP236-TP240 = SparkFun-Passives
U1 U5 U8 U11 U14 U17 U20 U23 U26 U29 U32 U35 = SparkFun-DigitalIC; PROD_ID: IC-12357
U2 U6 U9 U12 U15 U18 U21 U24 U27 U30 U33 U36 = SparkFun-AnalogIC; PROD_ID: IC-12358
U3 U4 U7 U10 U13 U16 U19 U22 U25 U28 U31 U34 = SparkFun-PowerIC; PROD_ID: VREG-00823